# Altium PCB mounting_pcb.PcbDoc (part 1 of 2)
Units mm, origin at the board's own origin, x right, y up, seen from the top; angles counter-clockwise.
Board outline 80 x 80 mm, 2 copper layers (Top Layer, Bottom Layer), stack 0.141 mm thick; 75 components, 159 nets, 340 pads, 197 vias.
Unrouted connection lines stored in the file: 1.
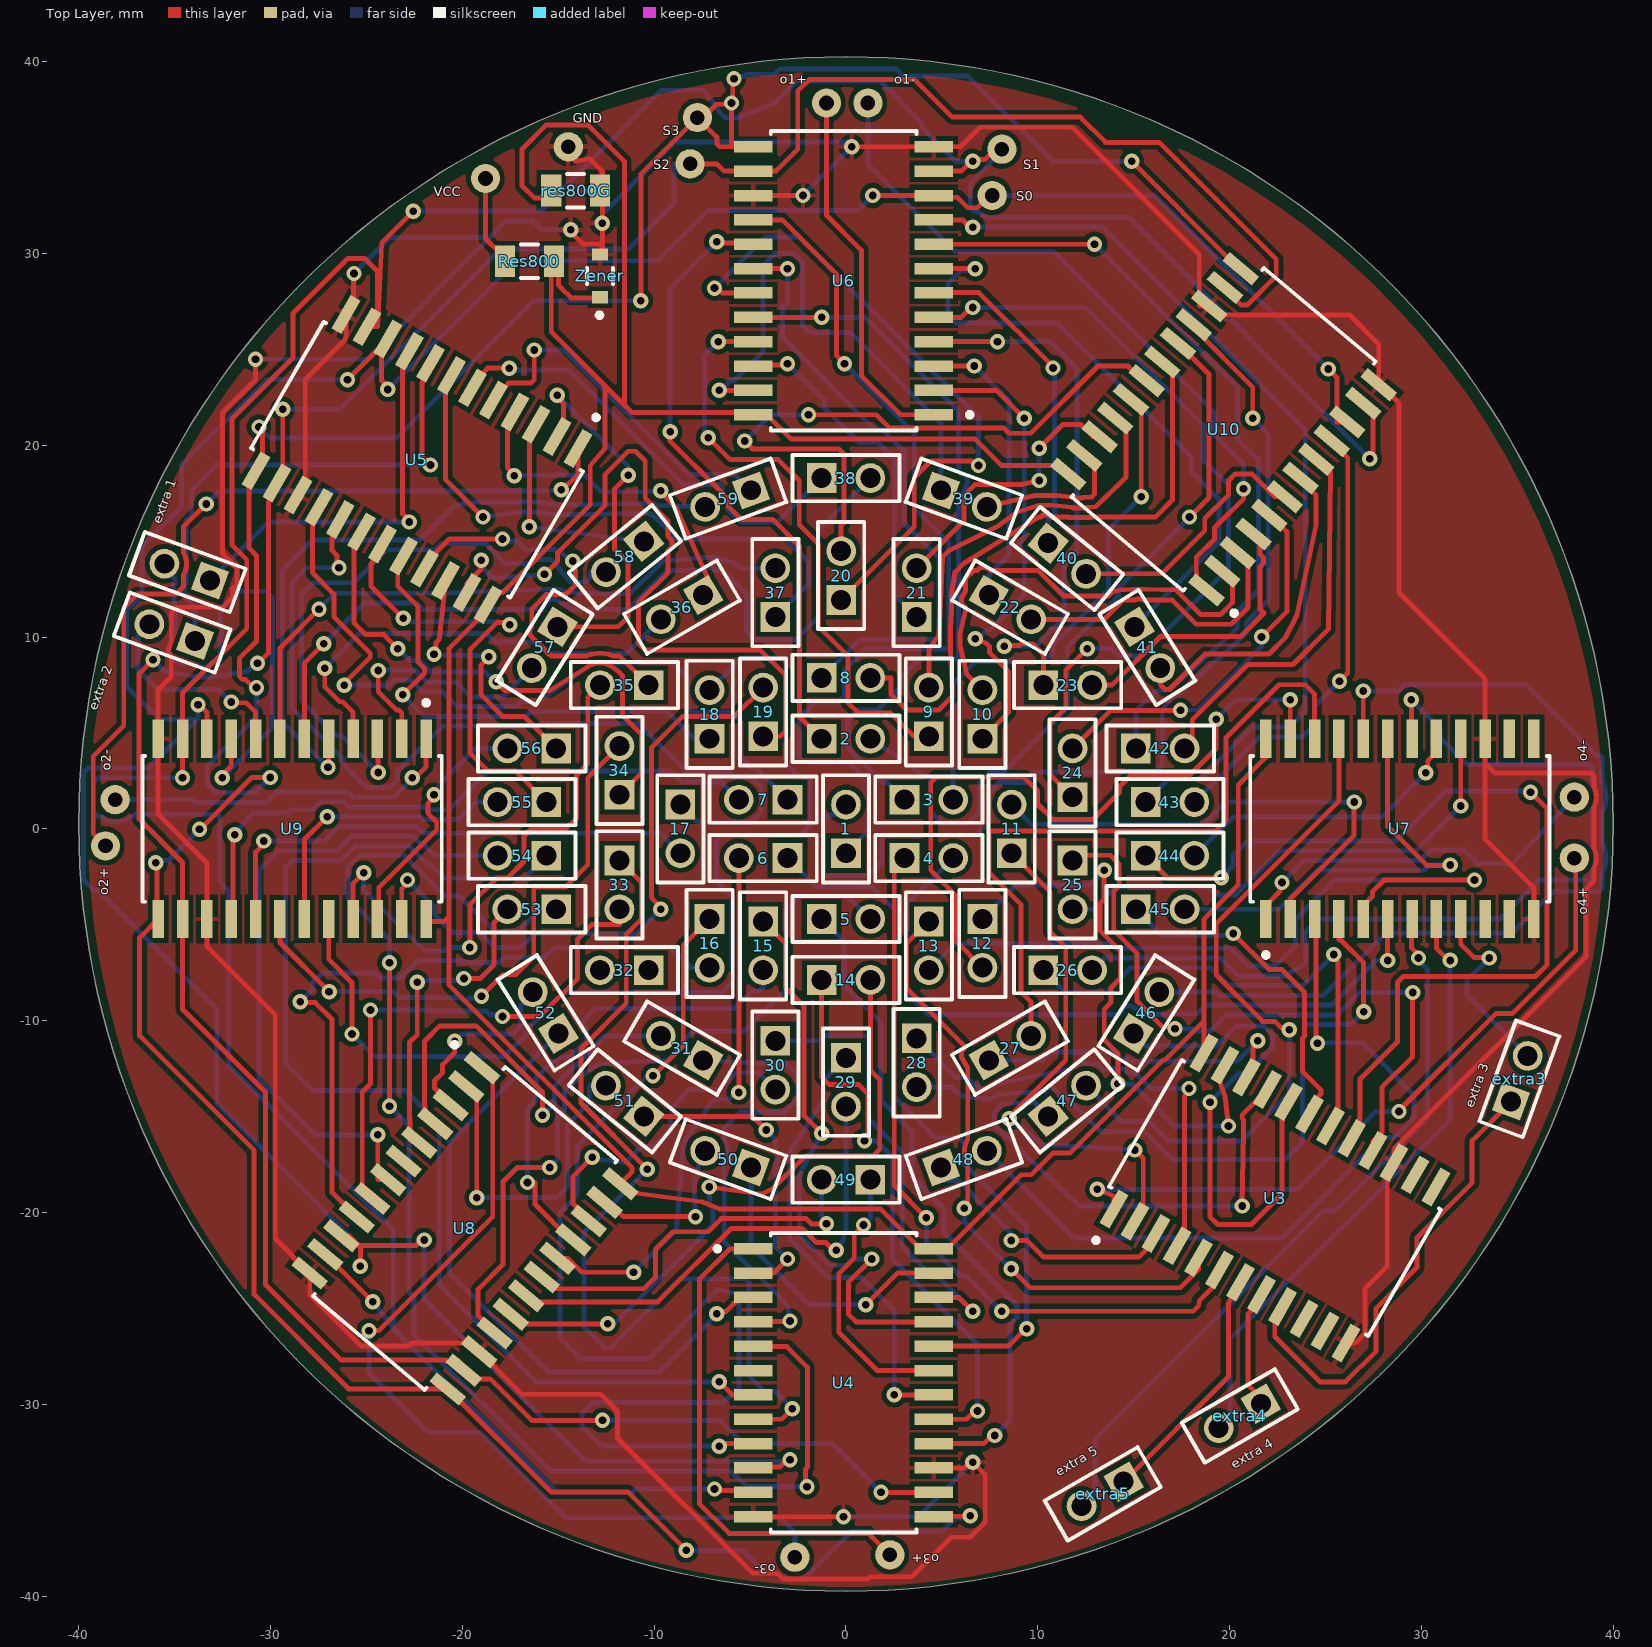
[diagram p0: Top Layer view]
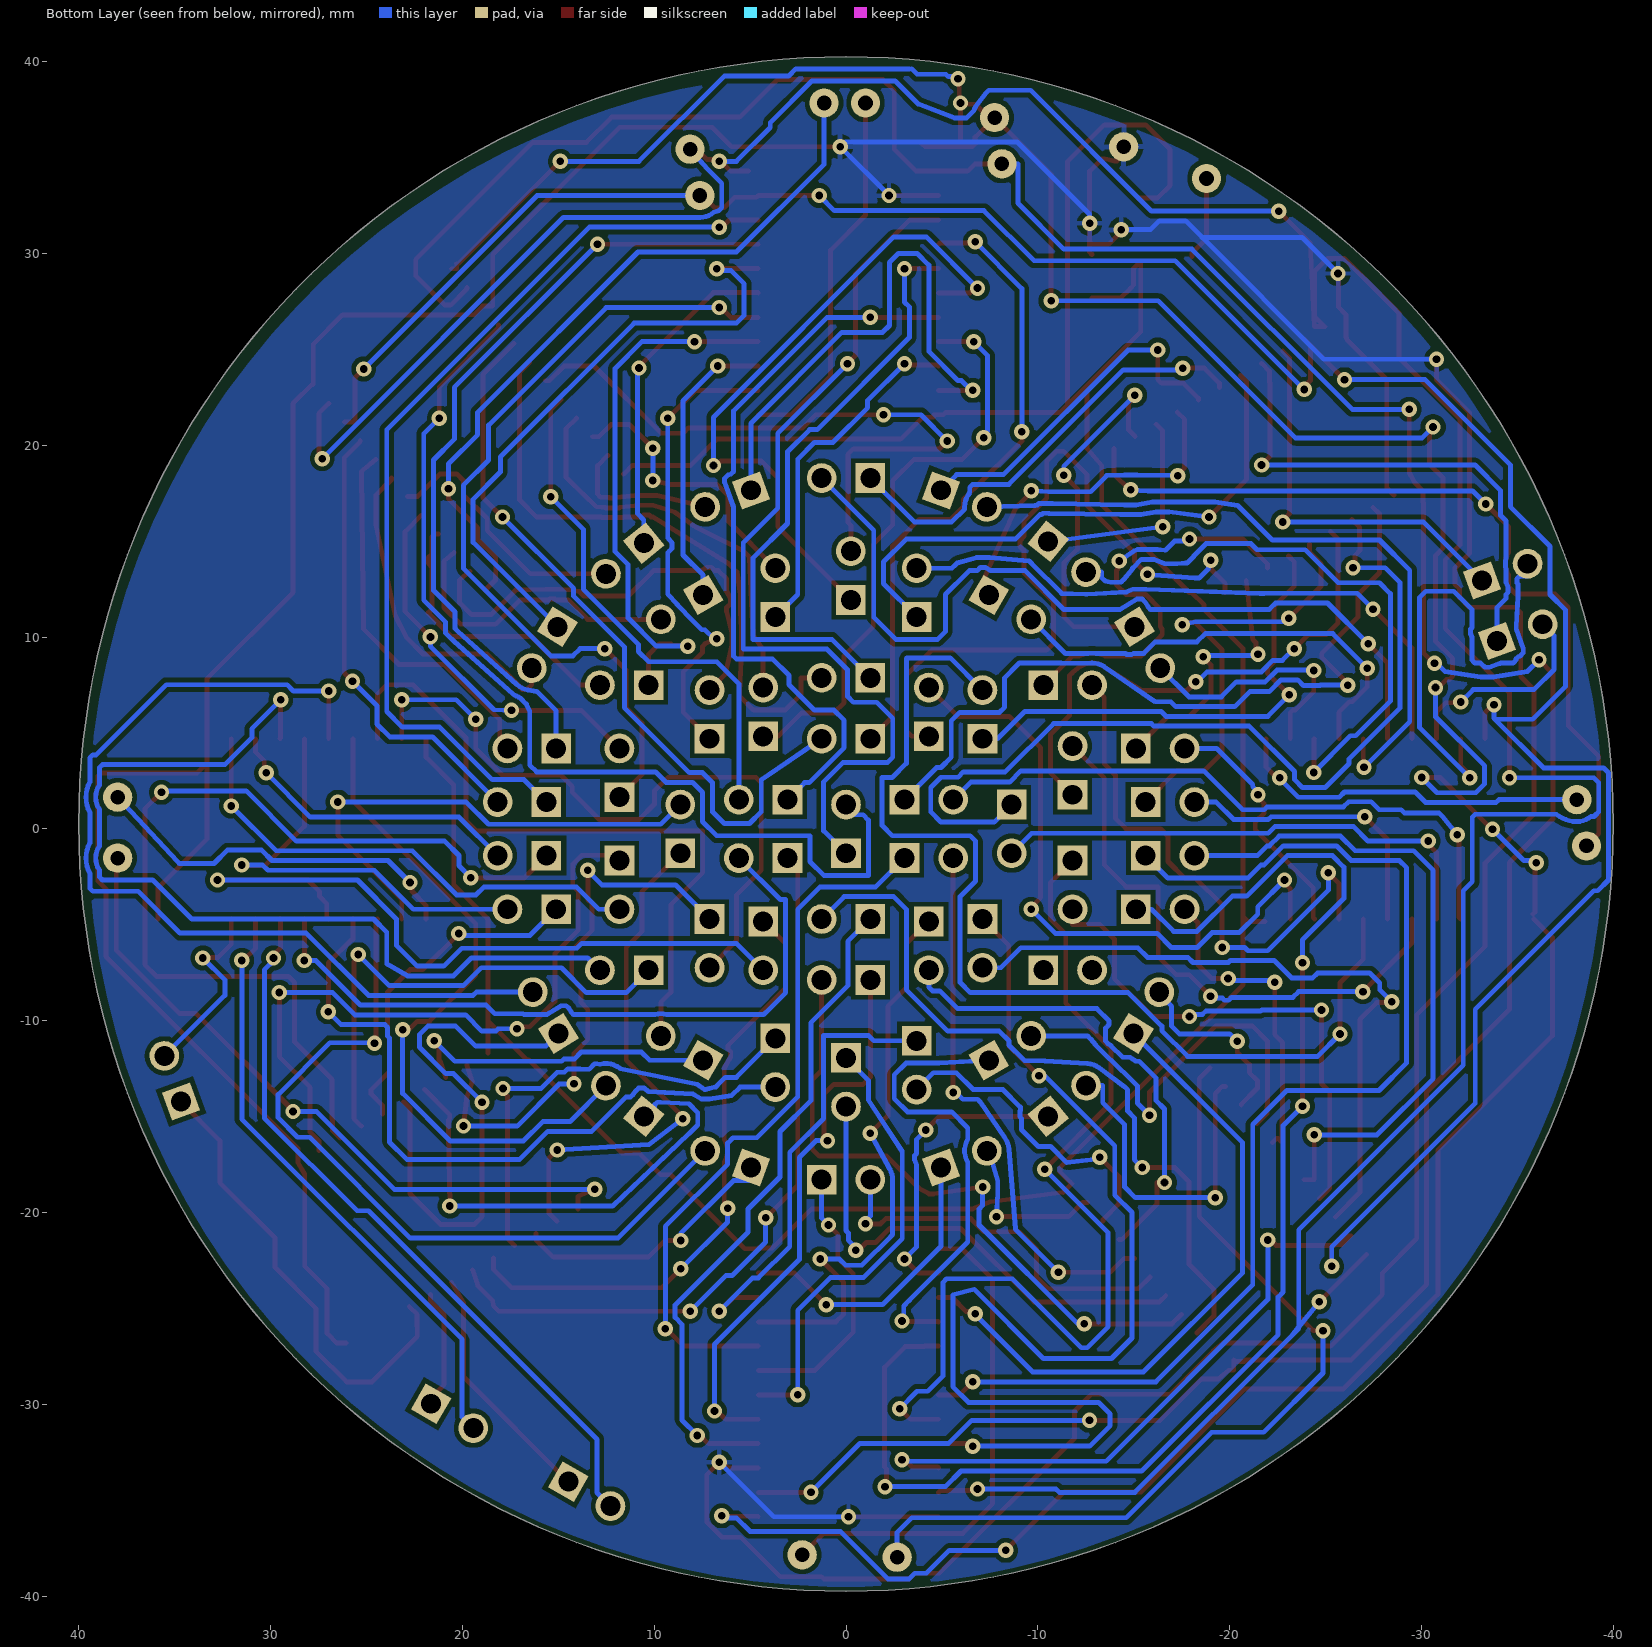
[diagram p1: Bottom Layer view, seen from below]
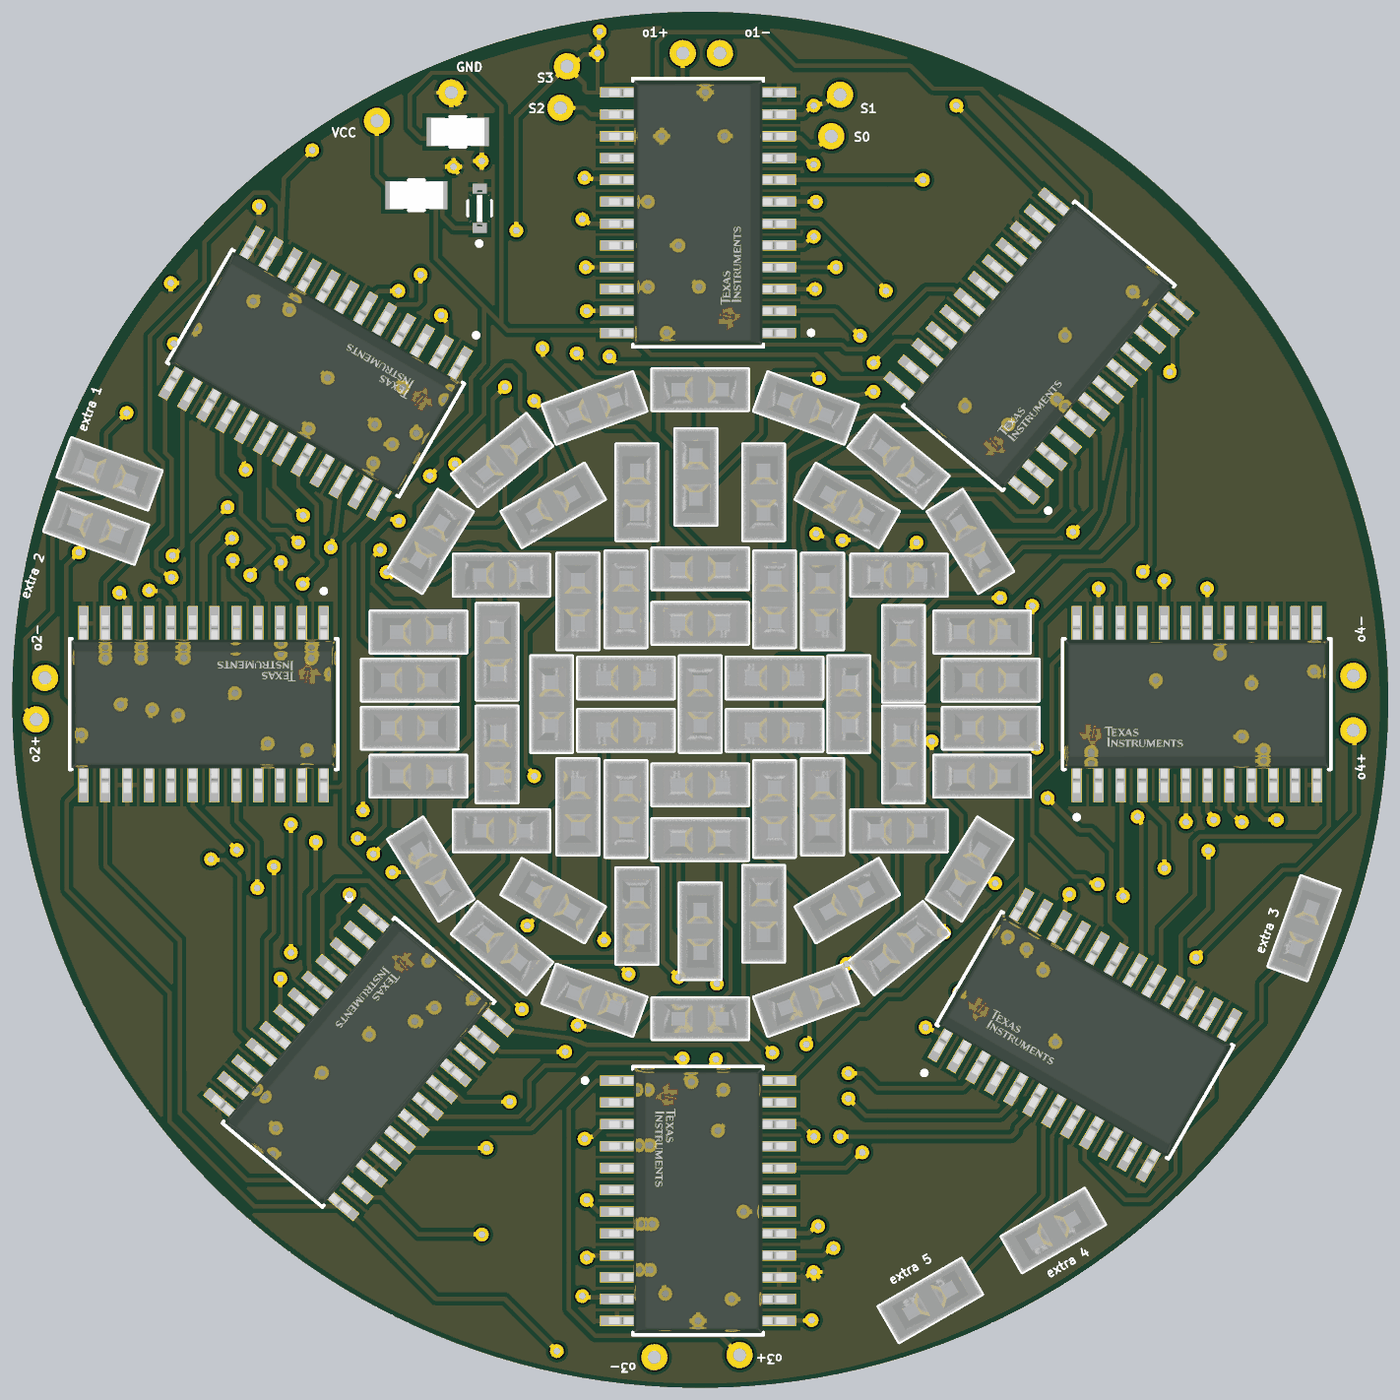
[diagram p3: 3D render of the assembled board from above, using the file's embedded part models]

## Layer stack, top to bottom
Top Solder: solder mask 0.0102, Solder Resist, Dk 3.5
Top Layer: signal copper 0.035
Dielectric 2: prepreg 0.0711, PP-006, Dk 4.1
Bottom Layer: signal copper 0.035
Bottom Solder: solder mask 0.0102, Solder Resist, Dk 3.5

## Board outline
-40,0.254 ccw(c0,0.254) 0,-39.746 ccw(c0,0.254) 40,0.254 ccw(c0,0.254) 0,40.254 ccw(c0,0.254)

## Design rules (kind name [scope] priority, off if disabled: settings)
Clearance [All] p1: gap=0.254 ignorepadtopadclearanceinfootprint=FALSE except(0: Arc-Hole Track-Hole SMDPad-Hole THPad-Hole Via-Hole Fill-Hole Poly-Hole Region-Hole Text-Hole)
PolygonConnect [All] p1: connectstyle=Relief reliefconductorwidth=0.254 reliefentries=4 polygonreliefangle="90 Angle" airgapwidth=0.254
RoutingVias [All] p1: holewidth=0.4 width=0.8 viastyle="Through Hole" minholewidth=0.2 minwidth=0.6 maxholewidth=0.5 maxwidth=1
SMDNeckDown [All] p1: percent=50.000
SolderMaskExpansion [All] p1: expansion=0.102 istentingtop=FALSE
Width [All] p1: maxlimit=0.312 minlimit=0.222 preferedwidth=0.254 minimp=50.000000 maximp=50.000000 favimp=50.000000
30 further rules are at their usual default settings.

## Classes and differential pairs
component class mounting_circuit(2): 1 2 5 7 10 19 23 26 33 41 58 "extra 2" U9 U10
component class mounting_circuit(4): 2 26 28 41 44 45 46 48 50 58 extra3 extra4 U7
component class mounting_circuit(3): 1 2 5 7 8 10 19 23 26 28 41 44 50 U4 U7
component class mounting_circuit: 1 2 7 8 10 23 26 33 41 43 48 58 res800G U10 Zener

## Components (designator, comment, footprint, x,y, rotation, side; value= is the part's Value field where it differs from the comment)
1 "Comment" SMTC-SSW-102-02-X-S 0,-1.27 r90 top
2 "Comment" SMTC-SSW-102-02-X-S -1.27,4.699 r0 top
3 "Comment" SMTC-SSW-102-02-X-S 3.048,1.524 r0 top
4 "Comment" SMTC-SSW-102-02-X-S 3.048,-1.524 r0 top
5 "Comment" SMTC-SSW-102-02-X-S -1.27,-4.699 r0 top
6 "0" SMTC-SSW-102-02-X-S -3.048,-1.524 r180 top
7 "Comment" SMTC-SSW-102-02-X-S -3.048,1.524 r180 top
8 "Comment" SMTC-SSW-102-02-X-S -1.27,7.874 r0 top
9 "1" SMTC-SSW-102-02-X-S 4.318,4.826 r90 top
10 "Comment" SMTC-SSW-102-02-X-S 7.112,4.699 r90 top
11 "1" SMTC-SSW-102-02-X-S 8.636,-1.27 r90 top
12 "Comment" SMTC-SSW-102-02-X-S 7.112,-4.699 r270 top
13 "Comment" SMTC-SSW-102-02-X-S 4.318,-4.826 r270 top
14 "Comment" SMTC-SSW-102-02-X-S -1.27,-7.874 r0 top
15 "Comment" SMTC-SSW-102-02-X-S -4.318,-4.826 r270 top
16 "Comment" SMTC-SSW-102-02-X-S -7.112,-4.699 r270 top
17 "Comment" SMTC-SSW-102-02-X-S -8.636,1.27 r270 top
18 "0" SMTC-SSW-102-02-X-S -7.112,4.699 r90 top
19 "Comment" SMTC-SSW-102-02-X-S -4.318,4.826 r90 top
20 "Comment" SMTC-SSW-102-02-X-S -0.254,11.938 r90 top
21 "Comment" SMTC-SSW-102-02-X-S 3.683,11.049 r90 top
22 "Comment" SMTC-SSW-102-02-X-S 7.452,12.192 r330 top
23 "Comment" SMTC-SSW-102-02-X-S 10.287,7.493 r0 top
24 "0" SMTC-SSW-102-02-X-S 11.811,1.651 r90 top
25 "0" SMTC-SSW-102-02-X-S 11.811,-1.651 r270 top
26 "Comment" SMTC-SSW-102-02-X-S 10.287,-7.366 r0 top
27 "Comment" SMTC-SSW-102-02-X-S 7.452,-12.065 r30 top
28 "Comment" SMTC-SSW-102-02-X-S 3.683,-10.922 r270 top
29 "Comment" SMTC-SSW-102-02-X-S 0,-11.938 r270 top
30 "Comment" SMTC-SSW-102-02-X-S -3.683,-11.049 r270 top
31 "Comment" SMTC-SSW-102-02-X-S -7.452,-12.065 r150 top
32 "Comment" SMTC-SSW-102-02-X-S -10.287,-7.366 r180 top
33 "Comment" SMTC-SSW-102-02-X-S -11.811,-1.651 r270 top
34 "Comment" SMTC-SSW-102-02-X-S -11.811,1.778 r90 top
35 "Comment" SMTC-SSW-102-02-X-S -10.287,7.493 r180 top
36 "Comment" SMTC-SSW-102-02-X-S -7.452,12.192 r210 top
37 "Comment" SMTC-SSW-102-02-X-S -3.683,11.049 r90 top
38 "1" SMTC-SSW-102-02-X-S -1.27,18.288 r0 top
39 "Comment" SMTC-SSW-102-02-X-S 4.953,17.653 r340 top
40 "0" SMTC-SSW-102-02-X-S 10.541,14.896 r321 top
41 "Comment" SMTC-SSW-102-02-X-S 15.037,10.536 r302 top
42 "Comment" SMTC-SSW-102-02-X-S 15.113,4.191 r0 top
43 "Comment" SMTC-SSW-102-02-X-S 15.621,1.397 r0 top
44 "0" SMTC-SSW-102-02-X-S 15.621,-1.397 r0 top
45 "Comment" SMTC-SSW-102-02-X-S 15.113,-4.191 r0 top
46 "Comment" SMTC-SSW-102-02-X-S 14.986,-10.668 r58 top
47 "Comment" SMTC-SSW-102-02-X-S 10.541,-14.986 r39 top
48 "Comment" SMTC-SSW-102-02-X-S 4.953,-17.653 r20 top
49 "0" SMTC-SSW-102-02-X-S 1.27,-18.288 r180 top
50 "Comment" SMTC-SSW-102-02-X-S -4.953,-17.653 r160 top
51 "1" SMTC-SSW-102-02-X-S -10.541,-14.986 r141 top
52 "Comment" SMTC-SSW-102-02-X-S -14.986,-10.668 r122 top
53 "Comment" SMTC-SSW-102-02-X-S -15.113,-4.191 r180 top
54 "Comment" SMTC-SSW-102-02-X-S -15.621,-1.397 r180 top
55 "0" SMTC-SSW-102-02-X-S -15.621,1.397 r180 top
56 "Comment" SMTC-SSW-102-02-X-S -15.113,4.191 r180 top
57 "Comment" SMTC-SSW-102-02-X-S -15.037,10.536 r238 top
58 "Comment" SMTC-SSW-102-02-X-S -10.541,14.986 r219 top
59 "Comment" SMTC-SSW-102-02-X-S -4.953,17.653 r200 top
extra3 "Comment" SMTC-SSW-102-02-X-S 34.671,-14.224 r70 top
extra4 "Comment" SMTC-SSW-102-02-X-S 21.631,-29.972 r210 top
extra5 "Comment" SMTC-SSW-102-02-X-S 14.478,-34.036 r210 top
"extra 1" "Comment" SMTC-SSW-102-02-X-S -33.147,12.954 r160 top
"extra 2" "Comment" SMTC-SSW-102-02-X-S -33.935,9.799 r160 top
Res800 "MCA12060D8000BP500" FP-MCA1206-IPC_C -16.504,29.591 r0 top
res800G "MCA12060D8000BP500" FP-MCA1206-IPC_C -14.097,33.274 r180 top
U3 "CD74HC4067M96" FP-DW0024A-MFG 22.368,-19.247 r60 top
U4 "CD74HC4067M96" FP-DW0024A-MFG -0.127,-28.875 r0 top
U5 "CD74HC4067M96" FP-DW0024A-MFG -22.368,19.247 r240 top
U6 "CD74HC4067M96" FP-DW0024A-MFG -0.127,28.575 r180 top
U7 "CD74HC4067M96" FP-DW0024A-MFG 28.875,0 r90 top
U8 "CD74HC4067M96" FP-DW0024A-MFG -19.865,-20.828 r320 top
U9 "CD74HC4067M96" FP-DW0024A-MFG -28.875,0 r270 top
U10 "CD74HC4067M96" FP-DW0024A-MFG 19.685,20.828 r140 top
Zener "MM3Z5V6ST1G" FP-477-02-MFG -12.827,28.829 r90 top

## Footprints (in the part's own frame and the unit in brackets; to place one, negate y for a bottom-side part, rotate by r counter-clockwise, add the part's x,y. Pads: shape width x height; smd on the part's side, far side on the other; paste and mask are expansions set on the pad)
FP-477-02-MFG [mm]
  rect 0.63x0.83 smd paste+0 mask+0: 1(-1.115,0) 2(1.115,0)
  silkscreen extent -2.17,-0.67 0.42,0.67, body extent -1.53,-0.77 1.53,0.77, height 0.25
FP-DW0024A-MFG [mm]
  rect 2x0.6 smd paste-1000 mask+0: 1(-4.7,6.985) 2(-4.7,5.715) 3(-4.7,4.445) 4(-4.7,3.175) 5(-4.7,1.905) 6(-4.7,0.635) 7(-4.7,-0.635) 8(-4.7,-1.905) 9(-4.7,-3.175) 10(-4.7,-4.445) 11(-4.7,-5.715) 12(-4.7,-6.985) 13(4.7,-6.985) 14(4.7,-5.715) 15(4.7,-4.445) 16(4.7,-3.175) 17(4.7,-1.905) 18(4.7,-0.635) 19(4.7,0.635) 20(4.7,1.905) 21(4.7,3.175) 22(4.7,4.445) 23(4.7,5.715) 24(4.7,6.985)
  silkscreen extent -6.7,-7.8 3.8,7.8, body extent -5.8,-7.98 5.8,7.98, height 0.25
FP-MCA1206-IPC_C [mm]
  rect 1.056x1.658 smd paste+0 mask+0: 1(-1.276,0) 2(1.276,0)
  silkscreen extent -0.45,-0.87 0.45,0.87, body extent -1.9,-0.97 1.9,0.97, height 0.25
SMTC-SSW-102-02-X-S [mm] "SQ Post Socket, 1x2 Pins, Vertical, 2.54mm Pitch, Female"
  rect 1.55x1.55 hole 1.04: 1(0,0)
  round 1.55 hole 1.04: 2(2.54,0)
  silkscreen extent -1.53,-1.2 4.07,1.2, body extent -1.52,-1.21 4.06,1.21, height 8.51

## Part data
1 2 3 4 5 6 7 8 9 10 11 12 13 14 15 16 17 18 19 20 21 22 23 24 25 26 27 28 29 30 31 32 33 34 35 36 37 38 39 40 41 42 43 44 45 46 47 48 49 50 51 52 53 54 55 56 57 58 59 extra3 extra4 extra5 "extra 1" "extra 2": library part CMP-1023-00323-1, "SQ Post Socket, Through-hole, Vertical, -55 to 105 degC, 2.54 mm Pitch, 2-Pin, Female, RoHS", Manufacturer=Samtec, PartNumber=SSW-102-02-T-S, Temperature Range="-55 to 105 degC", ComponentLink1Description="Manufacturer URL", ComponentLink1URL=http://www.samtec.com, ComponentLink2Description=Datasheet, ComponentLink2URL=http://www.samtec.com/documents/webfiles/pdf/SSW_TH.PDF, ComponentLink3Description="Package Specification", ComponentLink3URL=http://www.samtec.com/documents/webfiles/cpdf/SSW-1XX-XX-XXX-X-XX-XXX-XX-MKT.pdf, DatasheetVersion=F-214, Mounting Technology=Through-hole, Orientation=Vertical, PackageDescription="Assembly, Socket Strip .016 X .031 Tail", PackageReference=SSW-102-02-X-S, PackageVersion="CA, 6/1987", Pitch="2.54 mm", RoHS=True
Res800 res800G: library part CMP-02407-008722-1, "Res MC Precision Thin Film 1206 800Ω 0.1% 0.25W ±25ppm/°C Molded Paper T/R", Case/Package=1206, Max Operating Temperature=125°C, Max Power Dissipation=250mW, Min Operating Temperature=-55°C, Package Quantity=5000, Resistance=800R, Temperature Coefficient=25ppm/°C, Tolerance=0.1%, Composition="Thin Film", Height=0.026inch, Lead Free="Lead Free", Length=0.126inch, Number of Terminations=2, Packaging="Tape and Reel", Width=0.063inch
U3 U4 U5 U6 U7 U8 U9 U10: library part CMP-04901-000007-1, "IC MUX/DEMUX 1X16 24SOIC", Ambient Temperature Range High=+125°C, Ambient Temperature Range Low=-55°C, Manufacturer="Texas Instruments", Max Junction Temp=+150°C, Max Supply Voltage=6V, Min Supply Voltage=2V, Package=DW0024A, Quiescent Current=8uA, Temperature="-55°C to +125°C", Automotive=No, Category=IC, ComponentLink2Description=Datasheet, ComponentLink2URL=http://www.ti.com/lit/ds/symlink/cd74hc4067.pdf, Device Class L1="Integrated Circuits (ICs)", Device Class L2="Logic ICs", Device Class L3=Multiplexers, Digikey Description="IC MUX/DEMUX 1X16 24SOIC", Height=2.65mm, Ipc Land Pattern Name=SOIC127P1030X265-24, Lead Free=Yes, Logic Function Desc=Non-Inverting, Manufacturer Part Number=CD74HC4067M96, Mouser Description="Multiplexer Switch ICs Hi-Spd CMOS 16Ch Anl Mltplxr/Demltplxr", Number of Circuits=1, Number Of Inputs=16, Number Of Outputs=1, Octopart=https://octopart.com/cd74hc4067m96-texas+instruments-722802, Propagation Delay=6ns, RoHS=TRUE, Standoff Height=0.1mm, Temperature Range High=+125°C, Temperature Range Low=-55°C
Zener: library part CMP-1060-00706-2, "DIODE ZENER 5.6V 300MW SOD323", Case/Package=SOD-323-2, Forward Voltage=900mV, Max Operating Temperature=150°C, Max Power Dissipation=200mW, Max Reverse Leakage Current=1uA, Min Operating Temperature=-65°C, Package Quantity=1, Test Current=5mA, Tolerance=2%, Voltage Rating (DC)=5.6V, Zener Current=10mA, Contact Plating=Tin, Element Configuration=Single, ESD Protection=Yes, Height=1mm, Impedance=40R, Lead Free="Lead Free", Length=1.8mm, Material=Plastic, Number of Pins=2, Packaging="Tape and Reel", Peak Reverse Current=1uA, Power Dissipation=200mW, Power Rating=200mW, Radiation Hardening=No, REACH SVHC="No SVHC", Voltage Tolerance=2%, Width=1.35mm, Working Voltage=5.6V, Zener Voltage=5.6V

## Free pads (board coordinates)
  round 1.524 hole 0.762: 2(-1.016,37.846) 3(1.143,37.846) 5(-38.608,-0.889) 6(-38.1,1.524) 7(-2.667,-37.973) 7(2.286,-37.846) 9(37.973,-1.524) 10(37.973,1.651) gnd(-14.478,35.56) S0(7.62,33.02) S1(8.128,35.433) S2(-8.128,34.671) S3(-7.747,37.084) vcc(-18.796,33.909)

## Via types
v1: diameter 0.8, hole 0.4, Top Layer to Bottom Layer, 197 vias

## Nets (pads, with @x,y where several pads share a name; then routed paths per layer and width w, separated by ;. In a path a pad name is that pad's centre, name@x,y a point inside that pad or via, vN(x,y) a via of type N, cw(c..) or ccw(c..) an arc to the next point about the centre after c; other vN are vias at no path point)
GND: pad.gnd res800G.1 U3.12 U3.15 U4.12 U4.15 U5.12 U5.15 U6.12 U6.15 U7.12 U7.15 U8.12 U8.15 U9.12 U9.15 U10.12 U10.15 Zener.2 | length 352.6
  Top Layer w0.254: v1(-30.785,24.486) -30.785,23.419 -32.512,21.692 -32.512,14.364 -31.75,13.602 -31.75,12.75 -31.991,12.509 -31.991,12.065 -32.499,11.557 -34.9,11.557 -35.179,11.278 ; U5.15@-28.567,17.399 -28.194,17.773 -28.194,23.428 -26.108,25.514 -26.108,25.561 ; -26.108,25.562 -26.102,25.572 ; v1(-25.654,28.956) -25.686,28.924 -25.686,27.191 U5.12@-26.067,26.81 -26.067,25.632 ; pad.gnd@-14.478,35.56 -14.702,35.235 -14.674,35.241 -14.54,35.241 -14.122,34.823 -13.988,34.823 -13.484,34.94 -13.35,34.94 -12.7,34.29 ; v1(-14.351,31.242) -14.351,31.14 -13.691,30.48 -12.827,30.48 -12.7,30.607 ; Zener.2@-12.827,29.944 -12.7,30.071 -12.7,30.607 ; v1@-12.7,31.496 -12.7,30.607 ; U4.12@-4.827,-35.86 v1(-0.127,-35.86) ; U6.15@-4.827,33.02 v1(-2.244,33.02) ; v1(0.296,35.56) U6.12@4.573,35.56 5.969,35.56 6.985,36.576 11.786,36.576 18.415,29.947 ; U4.15@4.573,-33.32 6.156,-33.32 6.456,-33.02 v1(6.604,-33.02) 7.258,-33.674 7.258,-36.137 6.464,-36.932 5.486,-36.932 3.429,-38.989 1.27,-38.989 1.143,-39.116 -3.277,-39.116 -3.581,-38.811 -4.864,-38.811 -11.912,-31.763 -11.912,-30.353 -12.788,-29.477 -16.899,-29.477 U8.15@-19.122,-27.254 -19.658,-26.804 -22.631,-26.804 -22.794,-26.967 -25.273,-26.967 -27.955,-24.285 U8.12@-27.955,-23.158 -29.756,-21.357 -29.756,-9.69 -33.32,-6.126 U9.15@-33.32,-4.7 -33.32,-1.781 -35.86,0.759 U9.12@-35.86,4.7 -35.86,7.264 -35.179,7.945 -35.179,9.048 -35.31,9.178 -35.31,9.403 -35.179,9.762 ; U3.12@26.067,-26.81 26.543,-26.81 27.051,-26.302 27.051,-23.976 28.217,-22.809 28.217,-18.005 U3.15@28.567,-17.399 28.567,-16.67 38.583,-6.655 38.583,-3.124 38.989,-2.718 ; U7.12@35.86,-4.7 35.86,-3.073 33.32,-0.533 33.32,3.429 ; -35.179,9.762 -35.179,10.495 ; -35.179,9.762 -35.179,10.495 ; -35.179,9.762 -35.179,10.495 ; -35.179,9.762 -35.179,10.495 ; -35.179,9.762 -35.179,10.495 ; -35.179,9.762 -35.179,10.495 ; -35.179,10.495 ccw(c-36.322,10.668) -35.179,10.841 ; -35.179,10.495 ccw(c-36.322,10.668) -35.179,10.841 ; -35.179,10.495 ccw(c-36.322,10.668) -35.179,10.841 ; -35.179,10.495 ccw(c-36.322,10.668) -35.179,10.841 ; -35.179,10.495 ccw(c-36.322,10.668) -35.179,10.841 ; -35.179,10.495 ccw(c-36.322,10.668) -35.179,10.841 ; -35.179,10.495 ccw(c-36.322,10.668) -35.179,10.841 ; -35.179,10.495 ccw(c-36.322,10.668) -35.179,10.841 ; -35.179,10.841 -35.179,11.278 ; -35.179,10.841 -35.179,11.278 ; -35.179,10.841 -35.179,11.278 ; -35.179,10.841 -35.179,11.278 ; -35.179,10.841 -35.179,11.278 ; -35.179,10.841 -35.179,11.278 ; -26.102,25.572 ccw(c-26.321,25.7) -26.101,25.574 ; -26.102,25.572 ccw(c-26.321,25.7) -26.101,25.574 ; -26.102,25.572 ccw(c-26.321,25.7) -26.101,25.574 ; -26.102,25.572 ccw(c-26.321,25.7) -26.101,25.574 ; -26.102,25.572 ccw(c-26.321,25.7) -26.101,25.574 ; -26.102,25.572 ccw(c-26.321,25.7) -26.101,25.574 ; -26.102,25.572 ccw(c-26.321,25.7) -26.101,25.574 ; -26.102,25.572 ccw(c-26.321,25.7) -26.101,25.574 ; -26.101,25.574 -26.067,25.632 ; -26.101,25.574 -26.067,25.632 ; -26.101,25.574 -26.067,25.632 ; -26.101,25.574 -26.067,25.632 ; -12.7,30.607 -12.7,32.893 -12.7,34.29 ; v1(-12.7,31.572) -12.7,34.29 ; v1(-12.7,31.572) res800G.1@-12.7,33.274 ; v1(-12.7,31.572) -12.7,34.29 ; v1(-12.7,31.572) -12.7,34.29 ; v1(-12.7,31.572) res800G.1@-12.7,33.274 ; res800G.1@-12.7,33.274 -12.7,34.29 ; res800G.1@-12.7,33.274 -12.7,34.29 ; 18.415,27.254 U10.15@18.415,27.694 ; 18.415,27.254 18.415,29.947 ; 18.415,27.254 U10.15@18.415,27.694 ; 18.415,27.254 18.415,29.947 ; 18.415,27.254 18.415,29.947 ; 18.415,27.254 U10.15@18.415,27.694 ; 18.415,27.254 U10.15@18.942,27.254 19.392,26.804 20.393,26.804 20.4,26.797 26.251,26.797 27.775,25.273 U10.12@27.775,23.158 27.855,23.158 28.829,22.183 28.829,12.319 33.32,7.828 U7.15@33.32,4.7 33.32,3.429 ; 33.32,3.429 33.828,2.921 38.84,2.921 38.915,2.847 38.989,2.772 ; 38.989,-2.718 38.989,-2.048 ; 38.989,-2.718 38.989,-2.048 ; 38.989,-2.718 38.989,-2.048 ; 38.989,-2.718 38.989,-2.048 ; 38.989,-2.048 ccw(c37.973,-1.524) 38.989,-1 ; 38.989,-2.048 ccw(c37.973,-1.524) 38.989,-1 ; 38.989,-2.048 ccw(c37.973,-1.524) 38.989,-1 ; 38.989,-2.048 ccw(c37.973,-1.524) 38.989,-1 ; 38.989,-2.048 ccw(c37.973,-1.524) 38.989,-1 ; 38.989,-2.048 ccw(c37.973,-1.524) 38.989,-1 ; 38.989,-2.048 ccw(c37.973,-1.524) 38.989,-1 ; 38.989,-2.048 ccw(c37.973,-1.524) 38.989,-1 ; 38.989,-1 38.989,1.127 ; 38.989,-1 38.989,1.127 ; 38.989,-1 38.989,1.127 ; 38.989,-1 38.989,1.127 ; 38.989,1.127 ccw(c37.973,1.651) 38.989,2.175 ; 38.989,1.127 ccw(c37.973,1.651) 38.989,2.175 ; 38.989,1.127 ccw(c37.973,1.651) 38.989,2.175 ; 38.989,1.127 ccw(c37.973,1.651) 38.989,2.175 ; 38.989,1.127 ccw(c37.973,1.651) 38.989,2.175 ; 38.989,1.127 ccw(c37.973,1.651) 38.989,2.175 ; 38.989,1.127 ccw(c37.973,1.651) 38.989,2.175 ; 38.989,1.127 ccw(c37.973,1.651) 38.989,2.175 ; 38.989,2.175 38.989,2.772 ; 38.989,2.175 38.989,2.772 ; 38.989,2.175 38.989,2.772 ; 38.989,2.175 38.989,2.772
  Bottom Layer w0.254: v1(-30.785,24.486) -24.917,24.486 -18.567,30.836 ; v1(-25.654,28.956) -23.774,30.836 -18.567,30.836 ; v1(-14.351,31.242) -15.873,31.242 -16.33,31.699 -17.704,31.699 -18.567,30.836 ; v1(-12.7,31.572) -12.7,32.029 -8.915,35.814 0.042,35.814 v1(0.296,35.56) v1(-2.244,33.02) ; v1(-0.127,-35.86) 3.764,-35.86 v1(6.604,-33.02)
Net1_1: 1.1 U6.16 | length 48
  Top Layer w0.254: U6.16@-4.827,31.75 -3.327,31.75 -0.489,28.912 -0.489,24.67 v1(-0.076,24.257)
  Bottom Layer w0.254: v1(-0.076,24.257) 3.556,20.625 3.556,16.726 5.359,14.922 5.359,9.373 0.991,9.373 -0.076,8.306 -0.076,6.909 -0.381,6.604 -1.6,6.604 -2.438,5.766 -2.438,3.734 -2.159,3.454 0.161,3.454 1.168,2.447 1.168,-0.102 1.1@0,-1.27
Net1_2: 1.2 U10.16 | length 56.1
  Top Layer w0.254: U10.16@18.125,26.281 18.125,26.111 21.209,23.028 v1(21.209,21.412)
  Bottom Layer w0.254: 1.2@0,1.27 1.2@0,0.737 ; v1(21.209,21.412) 22.015,20.606 22.015,11.925 20.888,10.797 20.888,10.22 20.739,10.071 20.441,9.791 17.353,7.016 17.182,6.922 cw(c16.383,8.382) 16.994,6.834 16.662,6.502 16.485,6.13 16.485,3.327 16.129,2.972 9.931,2.972 9.386,2.426 8.001,2.426 7.48,1.905 7.48,0.381 6.743,-0.356 1.88,-0.356 1.88,-1.702 1.143,-2.438 -1.168,-2.438 -1.168,0.457 -0.889,0.737 ; -0.889,0.737 1.2@0,0.737 ; -0.889,0.737 1.2@0,0.737 ; -0.889,0.737 1.2@0,0.737 ; -0.889,0.737 1.2@0,0.737
Net1k_2: 
Net2_1: 2.1 U6.17 | length 47.8
  Top Layer w0.254: v1(-9.169,20.701) -9.169,20.218 ; v1(-6.731,30.607) -6.667,30.543 -4.891,30.543 U6.17@-4.827,30.48 ; 2.1@-1.27,4.699 -2.426,5.855 -2.426,14.745 -3.817,16.136 -5.461,16.136 -6.121,16.797 -6.121,17.17 ; -9.169,20.218 -6.694,17.743 ; -9.169,20.218 -6.694,17.743 ; -9.169,20.218 -6.694,17.743 ; -9.169,20.218 -6.694,17.743 ; -6.694,17.743 cw(c-7.34,16.784) -6.381,17.43 ; -6.694,17.743 cw(c-7.34,16.784) -6.381,17.43 ; -6.694,17.743 cw(c-7.34,16.784) -6.381,17.43 ; -6.694,17.743 cw(c-7.34,16.784) -6.381,17.43 ; -6.694,17.743 cw(c-7.34,16.784) -6.381,17.43 ; -6.694,17.743 cw(c-7.34,16.784) -6.381,17.43 ; -6.694,17.743 cw(c-7.34,16.784) -6.381,17.43 ; -6.694,17.743 cw(c-7.34,16.784) -6.381,17.43 ; -6.381,17.43 -6.121,17.17 ; -6.381,17.43 -6.121,17.17 ; -6.381,17.43 -6.121,17.17 ; -6.381,17.43 -6.121,17.17
  Bottom Layer w0.254: v1(-9.169,20.701) -9.169,28.169 v1(-6.731,30.607)
Net2_2: 2.2 U10.17 | length 39
  Top Layer w0.254: U10.17@17.309,25.308 18.923,23.694 18.923,17.272 v1(17.907,16.256)
  Bottom Layer w0.254: 2.2@1.27,4.699 4.42,2.54 4.42,0.889 5.029,0.279 6.35,0.279 6.96,0.889 6.96,2.413 7.481,2.934 8.166,2.934 11.557,6.325 11.557,9.486 14.199,12.128 14.199,12.548 v1(17.907,16.256)
Net2k_1: 
Net2k_2: 
Net3_1: 3.1 U6.20 | length 38.7
  Top Layer w0.254: U6.20@-4.827,26.67 v1(-1.27,26.67)
  Bottom Layer w0.254: v1(-1.27,26.67) 0.983,26.67 5.793,21.86 5.867,21.786 5.867,18.623 5.982,18.509 6.156,18.445 6.327,18.274 6.327,18.049 5.867,16.785 5.867,9.013 5.793,8.939 5.719,8.865 3.835,8.865 2.972,8.001 2.972,7.518 1.651,6.198 0.635,6.198 0.102,5.664 0.102,4.233 1.921,2.413 2.159,2.413 3.1@3.048,1.524
Net3_2: 3.2 U10.20 | length 27.2
  Top Layer w0.254: U10.20@14.86,22.39 15.392,21.857 v1(15.392,17.323)
  Bottom Layer w0.254: 3.2@5.588,1.524 5.588,7.569 6.731,8.712 10.287,8.712 10.82,9.246 10.82,9.627 13.691,12.497 13.691,15.621 v1(15.392,17.323)
Net4_1: 4.1 U3.6 | length 39
  Top Layer w0.254: 4.1@3.048,-1.524 2.515,-2.057 2.515,-18.593 v1(4.191,-20.269) ; v1(8.128,-25.146) 18.103,-25.146 18.39,-24.859 18.414,-24.61 19.181,-23.842 19.2,-23.786 U3.6@19.468,-23
  Bottom Layer w0.254: v1(4.191,-20.269) 4.191,-21.539 5.942,-23.29 6.272,-23.29 v1(8.128,-25.146)
Net4_2: 4.2 U7.6 | length 88.2
  Top Layer w0.254: v1(28.24,-6.863) U7.6@28.24,-4.7
  Bottom Layer w0.254: 4.2@5.588,-1.524 3.429,-3.683 3.15,-3.683 3.15,-8.534 4.218,-9.603 4.293,-9.677 ; v1(28.24,-6.863) 27.636,-6.863 25.311,-9.188 18.764,-9.188 18.314,-9.638 16.827,-9.638 16.795,-9.67 15.643,-9.67 15.575,-9.67 15.509,-9.631 14.849,-9.219 14.582,-9.219 14.439,-9.361 14.301,-9.583 14.206,-9.677 ; 4.293,-9.677 9.356,-9.677 ; 4.293,-9.677 9.356,-9.677 ; 4.293,-9.677 9.356,-9.677 ; 4.293,-9.677 9.356,-9.677 ; 4.293,-9.677 9.356,-9.677 ; 4.293,-9.677 9.356,-9.677 ; 9.356,-9.677 cw(c9.652,-10.795) 9.947,-9.677 ; 9.356,-9.677 cw(c9.652,-10.795) 9.947,-9.677 ; 9.356,-9.677 cw(c9.652,-10.795) 9.947,-9.677 ; 9.356,-9.677 cw(c9.652,-10.795) 9.947,-9.677 ; 9.356,-9.677 cw(c9.652,-10.795) 9.947,-9.677 ; 9.356,-9.677 cw(c9.652,-10.795) 9.947,-9.677 ; 9.356,-9.677 cw(c9.652,-10.795) 9.947,-9.677 ; 9.356,-9.677 cw(c9.652,-10.795) 9.947,-9.677 ; 9.947,-9.677 14.206,-9.677 ; 9.947,-9.677 14.206,-9.677 ; 9.947,-9.677 14.206,-9.677 ; 9.947,-9.677 14.206,-9.677 ; 9.947,-9.677 14.206,-9.677 ; 9.947,-9.677 14.206,-9.677
Net5.1k_1: 
Net5_1: 5.1 U4.16 | length 35
  Top Layer w0.254: U4.16@4.573,-32.05 7.172,-32.05 7.599,-31.623 v1(7.747,-31.623)
  Bottom Layer w0.254: 5.1@-1.27,-4.699 -0.102,-5.867 -0.102,-8.179 1.834,-10.114 1.834,-14.168 3.442,-15.776 3.442,-18.149 5.11,-19.816 5.11,-21.023 8.909,-24.823 8.909,-25.469 8.553,-25.825 8.553,-30.817 v1(7.747,-31.623)
Net5_2: 5.2 U8.16 | length 48.6
  Top Layer w0.254: U8.16@-18.305,-26.281 -18.305,-26.259 -19.177,-25.387 -19.177,-24.003 -17.882,-22.708 -17.882,-18.39 -17.145,-17.653 v1(-15.443,-17.653)
  Bottom Layer w0.254: v1(-15.443,-17.653) -15.037,-17.247 -15.037,-15.062 -14.681,-14.707 -14.681,-13.709 -14.681,-13.604 -14.532,-13.455 ; 5.2@1.27,-4.699 0.102,-3.531 -2.489,-3.531 -3.15,-4.191 -3.15,-8.382 -5.309,-10.541 -7.988,-10.541 -8.496,-11.049 -8.496,-11.274 -9.238,-12.016 -9.313,-12.09 -10.382,-12.097 -12.585,-12.234 ; -14.532,-13.455 -13.208,-12.462 ; -14.532,-13.455 -13.208,-12.462 ; -14.532,-13.455 -13.208,-12.462 ; -14.532,-13.455 -13.208,-12.462 ; -13.208,-12.462 cw(c-12.515,-13.388) -12.585,-12.234 ; -13.208,-12.462 cw(c-12.515,-13.388) -12.585,-12.234 ; -13.208,-12.462 cw(c-12.515,-13.388) -12.585,-12.234 ; -13.208,-12.462 cw(c-12.515,-13.388) -12.585,-12.234 ; -13.208,-12.462 cw(c-12.515,-13.388) -12.585,-12.234 ; -13.208,-12.462 cw(c-12.515,-13.388) -12.585,-12.234 ; -13.208,-12.462 cw(c-12.515,-13.388) -12.585,-12.234 ; -13.208,-12.462 cw(c-12.515,-13.388) -12.585,-12.234
Net6_1: 6.1 U4.20 | length 37.4
  Top Layer w0.254: U4.20@4.573,-26.97 8.457,-26.97 9.363,-26.063 v1(9.42,-26.063)
  Bottom Layer w0.254: 6.1@-3.048,-1.524 -1.549,-3.023 1.346,-3.023 2.515,-4.191 2.515,-13.97 4.648,-16.104 5.893,-16.104 6.172,-16.383 6.172,-17.475 9.42,-20.723 v1(9.42,-26.063)
Net6_2: 6.2 U8.20 | length 52.1
  Top Layer w0.254: U8.20@-15.04,-22.39 -14.503,-22.39 -13.779,-23.114 v1(-11.074,-23.114) ; v1(-5.588,-13.741) 6.2@-5.588,-1.524
  Bottom Layer w0.254: v1(-11.074,-23.114) -8.828,-20.867 ; v1(-5.588,-13.741) -5.736,-13.741 -6.091,-14.097 -6.859,-14.097 -6.951,-14.189 -6.98,-14.224 ; -8.828,-20.867 -8.492,-16.692 ; -8.828,-20.867 -8.492,-16.692 ; -8.828,-20.867 -8.492,-16.692 ; -8.828,-20.867 -8.492,-16.692 ; -8.492,-16.692 cw(c-7.34,-16.784) -8.291,-16.128 ; -8.492,-16.692 cw(c-7.34,-16.784) -8.291,-16.128 ; -8.492,-16.692 cw(c-7.34,-16.784) -8.291,-16.128 ; -8.492,-16.692 cw(c-7.34,-16.784) -8.291,-16.128 ; -8.492,-16.692 cw(c-7.34,-16.784) -8.291,-16.128 ; -8.492,-16.692 cw(c-7.34,-16.784) -8.291,-16.128 ; -8.492,-16.692 cw(c-7.34,-16.784) -8.291,-16.128 ; -8.492,-16.692 cw(c-7.34,-16.784) -8.291,-16.128 ; -8.291,-16.128 -6.98,-14.224 ; -8.291,-16.128 -6.98,-14.224 ; -8.291,-16.128 -6.98,-14.224 ; -8.291,-16.128 -6.98,-14.224
Net7_1: 7.1 U5.16 | length 54
  Top Layer w0.254: U5.16@-27.468,16.764 -27.813,16.419 -27.813,13.352 -26.697,12.236 -26.697,11.051 -24.8,9.154 -24.8,8.943 -26.162,7.581 v1(-26.162,7.493)
  Bottom Layer w0.254: v1(-26.162,7.493) -24.726,7.493 -24.707,7.474 -23.839,7.474 -23.547,7.766 -22.679,7.766 -22.069,7.156 -21.05,7.156 -20.269,6.375 -17.192,6.375 -16.938,6.629 -16.12,6.629 -13.482,8.445 ; 7.1@-3.048,1.524 -4.724,3.2 -4.953,3.2 -5.486,3.734 -5.486,5.626 -5.931,6.071 -8.001,6.071 -8.268,6.338 -8.268,7.875 -8.968,8.575 -9.042,8.649 -11.206,8.649 -11.219,8.636 ; -13.482,8.445 cw(c-12.827,7.493) -12.654,8.636 ; -13.482,8.445 cw(c-12.827,7.493) -12.654,8.636 ; -13.482,8.445 cw(c-12.827,7.493) -12.654,8.636 ; -13.482,8.445 cw(c-12.827,7.493) -12.654,8.636 ; -13.482,8.445 cw(c-12.827,7.493) -12.654,8.636 ; -13.482,8.445 cw(c-12.827,7.493) -12.654,8.636 ; -13.482,8.445 cw(c-12.827,7.493) -12.654,8.636 ; -13.482,8.445 cw(c-12.827,7.493) -12.654,8.636 ; -12.654,8.636 -11.219,8.636 ; -12.654,8.636 -11.219,8.636 ; -12.654,8.636 -11.219,8.636 ; -12.654,8.636 -11.219,8.636 ; -12.654,8.636 -11.219,8.636 ; -12.654,8.636 -11.219,8.636
Net7_2: 7.2 U9.16 | length 33.2
  Top Layer w0.254: U9.16@-32.05,-4.7 -31.96,-4.61 -31.96,-0.395 v1(-31.87,-0.305)
  Bottom Layer w0.254: v1(-31.87,-0.305) -31.113,0.632 -30.926,0.819 -29.125,0.819 -28.947,0.997 -27.793,0.997 -27.374,1.416 -26.201,1.416 -25.928,1.143 -21.951,1.143 -21.805,0.997 -20.676,0.997 -18.65,3.023 -9.119,3.023 -8.534,2.438 -6.502,2.438 7.2@-5.588,1.524
Net8_1: 8.1 U6.18 | length 31.8
  Top Layer w0.254: U6.18@-4.827,29.21 v1(-3.048,29.21)
  Bottom Layer w0.254: v1(-3.048,29.21) -3.048,27.466 -3.302,27.212 -3.302,25.615 1.497,20.817 1.897,20.817 3.048,19.666 3.048,15.921 4.851,14.118 4.851,9.881 0.737,9.881 8.1@-1.27,7.874
Net8_2: 8.2 U10.18 | length 32.3
  Top Layer w0.254: 8.2@1.27,7.874 2.337,7.874 2.337,7.023 3.162,6.198 4.826,6.198 5.539,6.911 5.539,7.12 5.442,9.372 5.442,10.44 5.505,11.331 5.505,12.221 5.688,13.384 6.149,13.845 10.058,16.256 10.158,16.256 10.269,16.367 10.561,16.367 10.698,16.256 11.581,16.256 11.608,16.229 12.747,16.229 12.774,16.256 16.129,16.256 17.018,17.145 17.018,23.81 U10.18@16.493,24.336
Net9_1: 9.1 U6.21 | length 30.5
  Top Layer w0.254: v1(-7.188,20.396) -6.045,19.253 -3.531,19.253 -2.438,18.161 -2.438,15.85 -1.422,14.834 -1.422,10.541 0.102,9.017 0.102,6.579 0.635,6.045 2.311,6.045 3.53,4.826 9.1@4.318,4.826 ; v1(-6.655,25.4) U6.21@-4.827,25.4
  Bottom Layer w0.254: v1(-7.188,20.396) -7.188,20.544 -7.385,20.741 -7.385,24.67 v1(-6.655,25.4)
Net9_2: 9.2 U10.21 | length 25.9
  Top Layer w0.254: 9.2@4.318,7.366 4.318,9.344 4.839,10.116 5.027,14.171 5.276,14.42 5.35,14.494 7.857,15.751 ; U10.21@14.044,21.417 14.605,20.856 14.605,18.339 14.456,18.19 13.009,16.791 12.564,16.764 12.536,16.737 11.819,16.737 11.792,16.764 10.772,16.875 10.058,16.875 8.9,16.505 ; 7.857,15.751 ccw(c7.34,16.784) 8.031,15.858 ; 7.857,15.751 ccw(c7.34,16.784) 8.031,15.858 ; 7.857,15.751 ccw(c7.34,16.784) 8.031,15.858 ; 7.857,15.751 ccw(c7.34,16.784) 8.031,15.858 ; 7.857,15.751 ccw(c7.34,16.784) 8.031,15.858 ; 7.857,15.751 ccw(c7.34,16.784) 8.031,15.858 ; 7.857,15.751 ccw(c7.34,16.784) 8.031,15.858 ; 7.857,15.751 ccw(c7.34,16.784) 8.031,15.858 ; 8.031,15.858 8.9,16.505 ; 8.031,15.858 8.9,16.505 ; 8.031,15.858 8.9,16.505 ; 8.031,15.858 8.9,16.505
Net10_1: 10.1 U6.2 | length 27.9
  Top Layer w0.254: U6.2@4.573,22.86 7.849,22.86 v1(9.296,21.412) ; v1(6.731,9.906) 7.325,9.672 7.474,9.523 7.474,9.202 8.484,8.192 8.484,6.071 10.1@7.112,4.699
  Bottom Layer w0.254: v1(6.731,9.906) 6.879,9.906 7.354,10.381 7.523,10.381 7.894,10.752 8.041,10.899 8.725,11.613 ; v1(9.296,21.412) 9.296,15.196 9.07,14.916 9.07,14.624 9.196,14.498 9.213,14.484 9.296,14.4 9.296,12.243 ; 8.725,11.613 cw(c9.652,10.922) 8.801,11.705 ; 8.725,11.613 cw(c9.652,10.922) 8.801,11.705 ; 8.725,11.613 cw(c9.652,10.922) 8.801,11.705 ; 8.725,11.613 cw(c9.652,10.922) 8.801,11.705 ; 8.725,11.613 cw(c9.652,10.922) 8.801,11.705 ; 8.725,11.613 cw(c9.652,10.922) 8.801,11.705 ; 8.725,11.613 cw(c9.652,10.922) 8.801,11.705 ; 8.725,11.613 cw(c9.652,10.922) 8.801,11.705 ; 8.801,11.705 9.296,12.243 ; 8.801,11.705 9.296,12.243 ; 8.801,11.705 9.296,12.243 ; 8.801,11.705 9.296,12.243
Net10_2: 10.2 U10.2 | length 23.9
  Top Layer w0.254: 10.2@7.112,7.239 6.297,8.054 5.95,9.583 5.95,10.229 6.223,11.33 6.223,11.54 6.149,11.615 6.013,11.75 6.013,12.01 6.223,12.375 6.223,13.03 6.655,13.462 6.841,13.462 7.011,13.632 7.271,13.632 7.565,13.462 10.033,13.462 10.108,13.388 11.354,12.142 13.665,12.142 13.895,12.372 14.273,12.446 14.964,12.493 15.652,12.493 17.231,12.446 17.306,12.372 18.501,11.176 19.536,11.176 20.142,11.782 20.142,12.973 20.148,12.979 U10.2@19.612,13.429
Net11_1: 11.1 U3.2 | length 27.3
  Top Layer w0.254: v1(8.509,-15.113) 8.509,-15.011 11.455,-12.065 11.455,-6.172 10.643,-5.359 10.643,-3.277 11.1@8.636,-1.27 ; v1(15.062,-16.739) 15.494,-17.17 15.494,-19.438 15.476,-19.456 15.476,-20.053 U3.2@15.069,-20.46
  Bottom Layer w0.254: v1(8.509,-15.113) 10.269,-16.457 v1(15.062,-16.739)
Net11_2: 11.2 U7.2 | length 26.2
  Top Layer w0.254: U7.2@23.16,-4.7 23.16,-3.658 26.492,-0.325 v1(26.492,1.397)
  Bottom Layer w0.254: 11.2@8.636,1.27 9.665,0.241 18.64,0.241 19.796,1.397 v1(26.492,1.397)
Net12_1: 12.1 U3.23 | length 29.7
  Top Layer w0.254: v1(13.462,-2.159) 13.449,-2.172 13.449,-3.694 13.233,-3.909 13.233,-5.283 14.3,-6.35 14.3,-7.798 13.818,-8.28 13.818,-9.049 13.462,-9.404 13.462,-10.997 14.18,-11.715 v1(14.18,-13.291) ; U3.23@19.769,-12.319 19.482,-13.162 19.755,-13.926 v1(19.939,-15.494)
  Bottom Layer w0.254: 12.1@7.112,-4.699 8.89,-2.921 12.725,-2.921 13.462,-2.184 v1(13.462,-2.159) ; v1(14.18,-13.291) 14.199,-13.31 14.961,-13.31 17.145,-15.494 v1(19.939,-15.494)
Net12_2: 12.2 U7.23 | length 36.6
  Top Layer w0.254: 12.2@7.112,-7.239 5.715,-5.842 5.715,-3.454 4.42,-2.159 4.42,2.413 4.699,2.692 9.271,2.692 9.982,1.981 9.982,1.295 10.795,0.483 12.852,0.483 14.275,1.905 14.275,2.21 14.859,2.794 17.907,2.794 19.304,4.191 v1(19.304,5.715) ; U7.23@23.16,4.7 v1(23.16,6.731)
  Bottom Layer w0.254: v1(19.304,5.715) 20.32,6.731 v1(23.16,6.731)
Net13_1: 13.1 U3.5 | length 70.8
  Top Layer w0.254: 13.1@4.318,-4.826 3.15,-5.994 3.15,-8.28 6.147,-11.278 6.147,-11.489 6.012,-11.623 6.012,-11.883 6.35,-12.468 ; v1(6.172,-19.787) v1@6.35,-19.609 ; v1(8.611,-22.936) 9.601,-23.927 17.428,-23.927 18.368,-22.987 U3.5@18.368,-22.365 ; v1@6.35,-19.609 6.35,-17.381 ; v1@6.35,-19.609 6.35,-17.381 ; v1@6.35,-19.609 6.35,-17.381 ; v1@6.35,-19.609 6.35,-17.381 ; v1@6.35,-19.609 6.35,-17.381 ; v1@6.35,-19.609 6.35,-17.381 ; 6.35,-17.381 cw(c7.34,-16.784) 6.35,-16.187 ; 6.35,-17.381 cw(c7.34,-16.784) 6.35,-16.187 ; 6.35,-17.381 cw(c7.34,-16.784) 6.35,-16.187 ; 6.35,-17.381 cw(c7.34,-16.784) 6.35,-16.187 ; 6.35,-17.381 cw(c7.34,-16.784) 6.35,-16.187 ; 6.35,-17.381 cw(c7.34,-16.784) 6.35,-16.187 ; 6.35,-17.381 cw(c7.34,-16.784) 6.35,-16.187 ; 6.35,-17.381 cw(c7.34,-16.784) 6.35,-16.187 ; 6.35,-16.187 6.35,-12.468 ; 6.35,-16.187 6.35,-12.468 ; 6.35,-16.187 6.35,-12.468 ; 6.35,-16.187 6.35,-12.468 ; 6.35,-16.187 6.35,-12.468 ; 6.35,-16.187 6.35,-12.468
  Bottom Layer w0.254: v1(6.172,-19.787) 6.172,-20.498 v1(8.611,-22.936)
Net13_2: 13.2 U7.5 | length 39.4
  Top Layer w0.254: U7.5@26.97,-4.7 27.074,-4.596 27.074,-3.896 27.446,-3.524 27.446,-3.279 28.058,-2.667 v1(32.766,-2.667)
  Bottom Layer w0.254: 13.2@4.318,-7.366 5.715,-5.969 13.78,-5.969 14.034,-6.223 20.035,-6.223 20.969,-7.156 22.353,-7.156 23.438,-6.072 23.438,-4.699 25.47,-2.667 v1(32.766,-2.667)
Net14_1: 14.1 U4.17 | length 29.7
  Top Layer w0.254: 14.1@-1.27,-7.874 -1.27,-12.941 -0.889,-13.322 0.635,-13.322 1.156,-13.843 1.156,-16.065 v1(0.965,-16.256) ; U4.17@4.573,-30.78 6.283,-30.78 6.71,-30.353 v1(6.858,-30.353)
  Bottom Layer w0.254: v1(0.965,-16.256) 1.562,-16.256 2.426,-17.12 2.426,-22.441 6.858,-26.873 v1(6.858,-30.353)
Net14_2: 14.2 U8.17 | length 33.8
  Top Layer w0.254: U8.17@-17.489,-25.308 -16.991,-25.806 v1(-12.421,-25.806) ; v1(-7.131,-18.669) -7.112,-18.669 -4.557,-19.027 -4.332,-19.027 -3.812,-18.747 -2.123,-17.058 1.397,-17.058 1.759,-16.696 1.759,-13.081 1.27,-12.592 14.2@1.27,-7.874
  Bottom Layer w0.254: v1(-12.421,-25.806) -12.09,-25.806 -6.934,-20.65 -6.934,-19.822 -7.112,-19.645 -7.112,-19.367 v1(-7.131,-18.669)
Net15_1: 15.1 U4.21 | length 49.4
  Top Layer w0.254: 15.1@-4.318,-4.826 -3.15,-5.994 -3.15,-8.28 -2.184,-9.246 -2.184,-14.961 v1(-1.27,-15.875) ; v1(1.346,-22.425) 0.127,-23.644 0.127,-25.298 0.529,-25.7 U4.21@4.573,-25.7
  Bottom Layer w0.254: v1(1.346,-22.425) 0.347,-22.425 0.02,-22.752 -0.831,-22.752 -2.352,-21.232 -2.426,-21.157 ; -2.426,-21.157 -2.426,-18.288 ; -2.426,-21.157 -2.426,-18.288 ; -2.426,-21.157 -2.426,-18.288 ; -2.426,-21.157 -2.426,-18.288 ; -2.426,-18.288 cw(c-1.27,-18.288) -2.285,-17.734 ; -2.426,-18.288 cw(c-1.27,-18.288) -2.285,-17.734 ; -2.426,-18.288 cw(c-1.27,-18.288) -2.285,-17.734 ; -2.426,-18.288 cw(c-1.27,-18.288) -2.285,-17.734 ; -2.426,-18.288 cw(c-1.27,-18.288) -2.285,-17.734 ; -2.426,-18.288 cw(c-1.27,-18.288) -2.285,-17.734 ; -2.426,-18.288 cw(c-1.27,-18.288) -2.285,-17.734 ; -2.426,-18.288 cw(c-1.27,-18.288) -2.285,-17.734 ; -2.285,-17.734 v1(-1.27,-15.875) ; -2.285,-17.734 v1(-1.27,-15.875) ; -2.285,-17.734 v1(-1.27,-15.875) ; -2.285,-17.734 v1(-1.27,-15.875)
Net15_2: 15.2 U8.21 | length 28.9
  Top Layer w0.254: v1(-16.605,-18.44) v1@-16.212,-18.44 ; U8.21@-14.224,-21.417 -14.372,-21.417 -16.212,-19.577 ; -16.212,-19.577 v1@-16.212,-18.44 ; -16.212,-19.577 v1@-16.212,-18.44 ; -16.212,-19.577 v1@-16.212,-18.44 ; -16.212,-19.577 v1@-16.212,-18.44
  Bottom Layer w0.254: v1(-16.605,-18.44) -16.605,-14.605 -16.154,-14.154 -16.154,-12.979 -15.292,-12.117 -15.123,-12.117 -14.791,-11.909 -14.424,-11.909 -13.812,-11.298 -13.679,-11.215 -13.537,-11.072 -13.537,-10.39 -13.712,-10.214 -13.712,-10.004 -13.081,-9.373 -5.817,-9.373 -4.889,-8.445 -4.508,-8.445 -4.318,-8.255 15.2@-4.318,-7.366
Net16_1: 16.1 U4.9 | length 60.2
  Top Layer w0.254: v1(-10.058,-12.878) -8.484,-11.303 -8.484,-6.071 16.1@-7.112,-4.699 ; v1(-6.604,-32.182) -6.472,-32.05 U4.9@-4.827,-32.05
  Bottom Layer w0.254: v1(-10.058,-12.878) -10.37,-12.878 -14.014,-16.522 -14.014,-19.094 -14.91,-19.99 -14.91,-26.543 -13.843,-27.61 -10.293,-27.61 -6.687,-24.003 -5.569,-24.291 -5.569,-29.083 -6.388,-29.902 -13.164,-29.902 -13.767,-30.505 -13.767,-31.115 -12.7,-32.182 v1(-6.604,-32.182)
Net16_2: 16.2 U8.9 | length 36.3
  Top Layer w0.254: v1(-28.448,-9.017) -28.404,-9.061 -27.667,-9.061 -26.797,-9.931 -26.797,-18.948 U8.9@-25.506,-20.239
  Bottom Layer w0.254: v1(-28.448,-9.017) -27.824,-8.393 -27.824,-8.035 -27.305,-7.516 -24.588,-7.516 -24.335,-7.769 -23.224,-7.769 -22.32,-6.864 -20.034,-6.864 -19.932,-6.966 -18.091,-6.966 -17.827,-6.702 -15.719,-6.702 -15.215,-6.198 -9.119,-6.198 -8.077,-7.239 16.2@-7.112,-7.239
Net17_1: 17.1 U5.17 | length 47.6
  Top Layer w0.254: v1(-26.435,13.614) -26.539,13.719 -26.539,14.265 -26.797,14.522 -26.797,15.104 -26.775,15.126 -26.775,15.722 U5.17@-26.368,16.129
  Bottom Layer w0.254: v1(-26.435,13.614) -28.111,13.614 -28.886,12.84 -28.886,6.306 -26.228,3.647 -26.228,3.406 -24.98,2.159 -23.788,2.159 -23.387,2.56 -23.387,2.99 -21.018,5.359 -16.049,5.359 -15.922,5.486 -10.82,5.486 -8.306,2.972 -6.121,2.972 -5.842,2.692 -4.953,2.692 -4.42,2.159 -4.42,0.889 -4.953,0.356 -7.722,0.356 17.1@-8.636,1.27
Net17_2: 17.2 U9.17 | length 26.9
  Top Layer w0.254: U9.17@-30.78,-4.7 -30.78,-1.21 -30.353,-0.783 v1(-30.353,-0.635)
  Bottom Layer w0.254: v1(-30.353,-0.635) -27.217,-0.635 -26.455,0.127 -22.372,0.127 -22.017,-0.229 -9.677,-0.229 17.2@-8.636,-1.27
Net18_1: 18.1 U5.20 | length 25.6
  Top Layer w0.254: v1(-23.114,6.985) -21.971,8.128 -21.971,8.351 -22.308,8.687 -22.308,11.584 -23.368,12.644 -23.368,13.924 U5.20@-23.068,14.224
  Bottom Layer w0.254: v1(-23.114,6.985) -21.996,5.867 -21.044,5.867 -16.684,5.867 -16.43,6.121 -9.322,6.121 -7.899,4.699 18.1@-7.112,4.699
Net18_2: 18.2 U9.20 | length 55.7
  Top Layer w0.254: U9.20@-26.97,-4.7 -26.97,-6.807 -25.756,-8.022 v1(-25.756,-10.693)
  Bottom Layer w0.254: v1(-25.756,-10.693) -24.587,-11.862 -17.812,-11.862 -16.466,-10.516 -16.466,-10.282 -14.718,-8.534 -6.477,-8.534 -5.944,-8.001 -5.944,-3.531 -6.756,-2.718 -6.756,-0.635 -6.477,-0.356 -2.413,-0.356 -1.88,0.178 -1.88,2.68 -2.413,2.68 -3.15,3.417 -3.15,8.89 -3.175,8.915 -5.436,8.915 18.2@-7.112,7.239
Net19_1: 19.1 U5.23 | length 38.5
  Top Layer w0.254: U5.23@-19.769,12.319 -19.769,12.801 -19.027,13.542 -19.027,13.993 v1(-19.011,14.009) ; v1(-15.721,13.271) -15.033,13.959 -15.033,14.392 -12.573,16.852 -12.573,18.459 -11.347,19.685 -10.973,19.685 -10.465,19.177 -10.465,17.234 -9.345,16.115 -9.271,16.04 -9.271,15.255 -9.07,15.006 -9.07,14.714 -9.196,14.588 ccw(c-9.017,14.407) -9.197,14.587 -9.271,14.513 -9.271,13.36 -10.82,11.811 -10.82,9.685 -10.458,9.322 -4.47,9.322 -3.15,8.001 -3.15,5.105 -3.429,4.826 19.1@-4.318,4.826
  Bottom Layer w0.254: v1(-19.011,14.009) -18.907,13.904 -18.907,13.573 -18.413,13.079 -18.203,13.079 v1(-15.721,13.271)
Net19_2: 19.2 U9.23 | length 33.6
  Top Layer w0.254: U9.23@-23.16,-4.7 -23.16,-3.115 -22.86,-2.815 v1(-22.86,-2.667) ; v1(-9.652,-4.191) -9.652,-4.076 -10.147,-3.582 -10.147,4.229 -8.509,5.867 -5.817,5.867 19.2@-4.318,7.366
  Bottom Layer w0.254: v1(-22.86,-2.667) -21.463,-4.064 -21.463,-4.445 -20.504,-5.404 -19.091,-5.404 -18.301,-6.194 -16.972,-6.194 -16.227,-5.449 -10.91,-5.449 v1(-9.652,-4.191)
Net20_1: 20.1 U6.19 | length 35.2
  Top Layer w0.254: v1(-6.858,28.194) -6.71,28.194 -6.456,27.94 U6.19@-4.827,27.94 ; 20.1@-0.254,11.938 3.556,15.748 3.556,18.313 4.42,19.177 6.532,19.177 6.761,18.948 v1(6.909,18.948)
  Bottom Layer w0.254: v1(-6.858,28.194) -4.191,30.861 -2.489,30.861 6.909,21.463 v1(6.909,18.948)
Net20_2: 20.2 U10.19 | length 34.3
  Top Layer w0.254: v1(-5.283,20.218) -4.877,19.812 -0.381,19.812 -0.102,19.533 -0.102,15.977 -0.254,15.824 20.2@-0.254,14.478 ; v1(-1.956,21.59) 1.575,21.59 2.261,20.904 8.219,20.904 8.496,20.628 9.638,20.628 13.14,24.13 14.696,24.13 15.463,23.363 U10.19@15.676,23.363
  Bottom Layer w0.254: v1(-5.283,20.218) -3.912,21.59 v1(-1.956,21.59)
Net21_1: 21.1 U6.22 | length 18.4
  Top Layer w0.254: U6.22@-4.827,24.13 -4.764,24.194 -3.111,24.194 v1(-3.048,24.257)
  Bottom Layer w0.254: v1(-3.048,24.257) -1.129,22.338 -1.129,21.957 0.686,20.142 1.651,20.142 2.515,19.279 2.515,12.217 21.1@3.683,11.049
Net21_2: 21.2 U10.22 | length 14.6
  Top Layer w0.254: 21.2@3.683,13.589 6.147,16.053 6.147,17.374 6.731,17.958 9.171,17.958 v1(10.077,18.164) ; v1(10.077,19.837) 10.077,19.856 11.303,21.082 12.247,21.082 12.885,20.444 U10.22@13.227,20.444
  Bottom Layer w0.254: v1(10.077,18.164) 10.059,18.971 10.059,19.079 v1(10.077,19.837)
Net22_1: 22.1 U6.3 | length 15.2
  Top Layer w0.254: U6.3@4.573,24.13 v1(6.68,24.13)
  Bottom Layer w0.254: v1(6.68,24.13) 8.496,22.314 8.496,14.279 7.452,13.236 22.1@7.452,12.192
Net22_2: 22.2 U10.3 | length 15.8
  Top Layer w0.254: 22.2@9.652,10.922 13.467,10.922 14.483,11.938 15.099,11.938 15.174,11.985 15.441,11.985 15.488,11.938 16.994,11.938 17.068,11.864 18.264,10.668 20.089,10.668 20.964,11.543 20.964,13.952 U10.3@20.428,14.402
Net22k(1)_1: 
Net22k(1)_2: 
Net22k(2)_1: 
Net22k(2)_2: 
Net23_1: 23.1 U6.4 | length 29
  Top Layer w0.254: U6.4@4.573,25.4 v1(7.899,25.4) ; v1(8.255,9.525) 8.289,9.559 9.036,9.559 9.129,9.652 9.728,9.652 10.287,9.093 23.1@10.287,7.493
  Bottom Layer w0.254: v1(7.899,25.4) 10.643,25.4 12.04,24.003 12.04,14.457 11.359,13.776 11.359,10.994 9.89,9.525 v1(8.255,9.525)
Net23_2: 23.2 U10.4 | length 15.1
  Top Layer w0.254: 23.2@12.827,7.493 13.859,7.493 16.397,10.031 20.572,10.031 21.793,11.252 21.664,11.381 21.59,11.455 21.59,13.638 21.768,13.85 21.768,14.147 21.59,14.325 21.59,15.226 U10.4@21.516,15.3 ; U10.4@21.245,15.375 21.441,15.375 U10.4@21.516,15.3
Net24_1: 24.1 U6.5 | length 43.3
  Top Layer w0.254: U6.5@4.573,26.67 6.008,26.67 6.516,27.178 v1(6.604,27.178) ; 24.1@11.811,1.651 10.643,2.819 10.643,5.512 11.455,6.325 11.455,8.28 v1(12.573,9.398)
  Bottom Layer w0.254: v1(6.604,27.178) 12.505,27.178 18.633,21.05 18.633,19.229 19.945,17.918 19.945,13.579 15.383,9.017 14.242,9.017 13.861,9.398 v1(12.573,9.398)
Net24_2: 24.2 U10.5 | length 19.9
  Top Layer w0.254: 24.2@11.811,4.191 13.799,6.179 v1(17.443,6.179) ; v1(21.666,10.008) 22.987,11.328 22.987,15.499 22.139,16.348 U10.5@22.061,16.348
  Bottom Layer w0.254: v1(17.443,6.179) 18.351,6.21 21.666,9.525 v1(21.666,10.008)
Net25_1: 25.1 U3.16 | length 35.4
  Top Layer w0.254: 25.1@11.811,-1.651 12.084,-1.378 13.785,-1.378 14.243,-1.836 14.243,-2.972 13.957,-3.258 13.957,-5.284 15.176,-6.503 15.176,-8.993 16.498,-10.315 17.046,-10.315 v1(17.15,-10.419) ; U3.16@27.468,-16.764 27.468,-16.282 27.94,-15.81 27.94,-13.48 29.54,-11.88 v1(29.54,-8.528)
  Bottom Layer w0.254: v1(17.15,-10.419) 18.134,-10.419 18.255,-10.541 18.987,-10.541 19.831,-9.696 25.613,-9.696 26.781,-8.528 v1(29.54,-8.528)
Net25_2: 25.2 U7.16 | length 26.3
  Top Layer w0.254: v1(32.05,1.194) U7.16@32.05,4.7
  Bottom Layer w0.254: 25.2@11.811,-4.191 12.884,-4.191 14.04,-3.035 18.885,-3.035 19.295,-3.445 20.304,-3.445 22.606,-1.143 29.713,-1.143 v1(32.05,1.194)
Net26_1: 26.1 U3.18 | length 26.4
  Top Layer w0.254: U3.18@25.268,-15.494 25.654,-15.108 25.654,-6.93 25.425,-6.701 v1(25.425,-6.553)
  Bottom Layer w0.254: 26.1@10.287,-7.366 11.455,-8.534 13.538,-8.534 14.834,-7.239 19.019,-7.239 19.953,-8.172 23.806,-8.172 v1(25.425,-6.553)
Net26_2: 26.2 U7.18 | length 80.1
  Top Layer w0.254: v1(29.464,6.731) 29.487,6.708 29.487,4.723 U7.18@29.51,4.7
  Bottom Layer w0.254: 26.2@12.827,-7.366 13.462,-6.731 19.527,-6.731 20.461,-7.664 22.861,-7.664 23.946,-7.036 23.946,-5.385 24.632,-4.699 34.112,-4.699 36.144,-2.667 38.659,-2.667 38.764,-2.667 38.913,-2.518 ; v1(29.464,6.731) 30.975,5.22 30.975,4.758 32.381,3.352 38.764,3.352 38.913,3.203 ; 38.913,-2.518 38.913,-2.175 ; 38.913,-2.518 38.913,-2.175 ; 38.913,-2.518 38.913,-2.175 ; 38.913,-2.518 38.913,-2.175 ; 38.913,-2.518 38.913,-2.175 ; 38.913,-2.518 38.913,-2.175 ; 38.913,-2.175 ccw(c37.973,-1.524) 38.913,-0.873 ; 38.913,-2.175 ccw(c37.973,-1.524) 38.913,-0.873 ; 38.913,-2.175 ccw(c37.973,-1.524) 38.913,-0.873 ; 38.913,-2.175 ccw(c37.973,-1.524) 38.913,-0.873 ; 38.913,-2.175 ccw(c37.973,-1.524) 38.913,-0.873 ; 38.913,-2.175 ccw(c37.973,-1.524) 38.913,-0.873 ; 38.913,-2.175 ccw(c37.973,-1.524) 38.913,-0.873 ; 38.913,-2.175 ccw(c37.973,-1.524) 38.913,-0.873 ; 38.913,-0.873 38.913,1 ; 38.913,-0.873 38.913,1 ; 38.913,-0.873 38.913,1 ; 38.913,-0.873 38.913,1 ; 38.913,1 ccw(c37.973,1.651) 38.913,2.302 ; 38.913,1 ccw(c37.973,1.651) 38.913,2.302 ; 38.913,1 ccw(c37.973,1.651) 38.913,2.302 ; 38.913,1 ccw(c37.973,1.651) 38.913,2.302 ; 38.913,1 ccw(c37.973,1.651) 38.913,2.302 ; 38.913,1 ccw(c37.973,1.651) 38.913,2.302 ; 38.913,1 ccw(c37.973,1.651) 38.913,2.302 ; 38.913,1 ccw(c37.973,1.651) 38.913,2.302 ; 38.913,2.302 38.913,3.203 ; 38.913,2.302 38.913,3.203 ; 38.913,2.302 38.913,3.203 ; 38.913,2.302 38.913,3.203 ; 38.913,2.302 38.913,3.203 ; 38.913,2.302 38.913,3.203
Net27_1: 27.1 U3.22 | length 16.9
  Top Layer w0.254: U3.22@20.868,-12.954 21.155,-12.112 21.172,-12.112 21.218,-12.065 21.218,-11.441 21.463,-11.197 v1(21.463,-11.049)
  Bottom Layer w0.254: 27.1@7.452,-12.065 10.236,-12.065 10.668,-11.633 13.792,-11.633 14.161,-12.002 14.714,-12.002 14.829,-12.117 20.395,-12.117 v1(21.463,-11.049)
Net27_2: 27.2 U7.22 | length 36.8
  Top Layer w0.254: 27.2@9.652,-10.795 9.652,-9.043 9.131,-8.522 9.131,-3.949 7.468,-2.286 7.468,-0.102 19.289,-0.102 19.812,0.421 19.812,4.75 22.574,7.512 23.941,7.512 24.43,7.023 U7.22@24.43,4.7
Net28_1: 28.1 U3.4 | length 44.6
  Top Layer w0.254: U3.4@17.268,-21.73 17.653,-21.345 17.653,-13.915 17.882,-13.686 v1(17.882,-13.538)
  Bottom Layer w0.254: 28.1@3.683,-10.922 5.715,-12.954 6.286,-12.954 6.731,-13.399 6.781,-13.449 7.326,-13.582 7.356,-13.582 7.386,-13.582 7.765,-13.316 ; v1(17.882,-13.538) 15.908,-13.538 15.06,-12.69 14.684,-12.69 14.503,-12.51 13.856,-12.51 13.837,-12.529 13.393,-12.529 13.182,-12.318 13.107,-12.244 12.972,-12.244 12.867,-12.269 12.837,-12.269 ; 7.765,-13.316 11.77,-12.504 ; 7.765,-13.316 11.77,-12.504 ; 7.765,-13.316 11.77,-12.504 ; 7.765,-13.316 11.77,-12.504 ; 11.77,-12.504 cw(c12.515,-13.388) 12.806,-12.269 ; 11.77,-12.504 cw(c12.515,-13.388) 12.806,-12.269 ; 11.77,-12.504 cw(c12.515,-13.388) 12.806,-12.269 ; 11.77,-12.504 cw(c12.515,-13.388) 12.806,-12.269 ; 11.77,-12.504 cw(c12.515,-13.388) 12.806,-12.269 ; 11.77,-12.504 cw(c12.515,-13.388) 12.806,-12.269 ; 11.77,-12.504 cw(c12.515,-13.388) 12.806,-12.269 ; 11.77,-12.504 cw(c12.515,-13.388) 12.806,-12.269 ; 12.806,-12.269 12.837,-12.269 ; 12.806,-12.269 12.837,-12.269 ; 12.806,-12.269 12.837,-12.269 ; 12.806,-12.269 12.837,-12.269
Net28_2: 28.2 U7.4 | length 37.5
  Top Layer w0.254: U7.4@25.7,-4.7 25.7,-5.772 ; v1(26.987,-9.542) 26.987,-6.978 25.781,-5.772 ; 25.7,-5.772 25.781,-5.772 ; 25.7,-5.772 25.781,-5.772 ; 25.7,-5.772 25.781,-5.772 ; 25.7,-5.772 25.781,-5.772
  Bottom Layer w0.254: 28.2@3.683,-13.462 5.521,-13.462 5.955,-13.896 7.115,-14.09 7.55,-14.09 7.975,-13.824 9.428,-13.74 10.311,-13.685 10.521,-13.515 10.813,-13.515 10.939,-13.641 11.138,-13.886 11.222,-13.97 11.463,-13.97 11.537,-14.044 13.261,-15.768 15.55,-15.768 17.009,-17.228 22.898,-17.228 23.803,-16.323 23.803,-10.893 23.895,-10.801 23.895,-10.353 24.044,-10.204 26.325,-10.204 v1(26.987,-9.542)
Net29_1: 29.1 U4.18 | length 23.9
  Top Layer w0.254: v1(2.515,-29.51) U4.18@4.573,-29.51
  Bottom Layer w0.254: 29.1@0,-11.938 -1.168,-13.106 -1.168,-14.148 -2.934,-16.821 -2.934,-17.024 -2.934,-21.368 -0.909,-23.393 0.813,-23.393 2.515,-25.095 v1(2.515,-29.51)
Net29_2: 29.2 U8.18 | length 26.1
  Top Layer w0.254: U8.18@-16.673,-24.336 -16.345,-24.663 -9.804,-24.663 -5.969,-20.828 -2.28,-20.828 -1.543,-21.565 -1.062,-21.565 -0.656,-21.971 v1(-0.508,-21.971)
  Bottom Layer w0.254: v1(-0.508,-21.971) -0.508,-21.823 -0.127,-21.442 -0.127,-21.068 0,-20.941 29.2@0,-14.478
Net30_1: 30.1 U4.22 | length 24.1
  Top Layer w0.254: U4.22@4.573,-24.43 5.888,-24.43 v1(6.604,-25.146)
  Bottom Layer w0.254: 30.1@-3.683,-11.049 -1.448,-11.049 -1.168,-10.77 1.168,-10.77 1.168,-15.1 2.934,-16.865 2.934,-21.781 4.564,-23.411 4.869,-23.411 v1(6.604,-25.146)
Net30_2: 30.2 U8.22 | length 16.7
  Top Layer w0.254: U8.22@-13.407,-20.444 -13.407,-20.366 -14.224,-19.55 -14.224,-18.11 v1(-13.233,-17.12)
  Bottom Layer w0.254: v1(-13.233,-17.12) -13.233,-17.196 -11.506,-17.399 -10.668,-16.561 -10.033,-16.561 -9.144,-15.672 -9.144,-15.098 -9.07,-15.006 -9.07,-14.714 -9.093,-14.691 -9.093,-14.608 -9.093,-14.503 -8.179,-13.589 -6.629,-13.589 -5.753,-12.713 -4.559,-12.713 30.2@-3.683,-13.589
Net31_1: 31.1 U4.4 | length 57
  Top Layer w0.254: U4.4@-4.827,-25.7 -4.804,-25.677 -2.944,-25.677 v1(-2.921,-25.654)
  Bottom Layer w0.254: 31.1@-7.452,-12.065 -4.851,-12.205 -3.137,-12.205 -2.515,-12.827 -2.515,-14.064 -3.208,-14.757 -5.512,-14.757 -6.35,-15.596 ; -6.276,-21.611 -6.35,-21.537 ; v1(-2.921,-25.654) -3.014,-25.561 -3.014,-24.873 -3.307,-24.58 -6.35,-21.537 ; -6.35,-21.537 -6.35,-17.381 ; -6.35,-21.537 -6.35,-17.381 ; -6.35,-21.537 -6.35,-17.381 ; -6.35,-21.537 -6.35,-17.381 ; -6.35,-21.537 -6.35,-17.381 ; -6.35,-21.537 -6.35,-17.381 ; -6.35,-17.381 ccw(c-7.34,-16.784) -6.35,-16.187 ; -6.35,-17.381 ccw(c-7.34,-16.784) -6.35,-16.187 ; -6.35,-17.381 ccw(c-7.34,-16.784) -6.35,-16.187 ; -6.35,-17.381 ccw(c-7.34,-16.784) -6.35,-16.187 ; -6.35,-17.381 ccw(c-7.34,-16.784) -6.35,-16.187 ; -6.35,-17.381 ccw(c-7.34,-16.784) -6.35,-16.187 ; -6.35,-17.381 ccw(c-7.34,-16.784) -6.35,-16.187 ; -6.35,-17.381 ccw(c-7.34,-16.784) -6.35,-16.187 ; -6.35,-16.187 -6.35,-15.596 ; -6.35,-16.187 -6.35,-15.596 ; -6.35,-16.187 -6.35,-15.596 ; -6.35,-16.187 -6.35,-15.596 ; -6.35,-16.187 -6.35,-15.596 ; -6.35,-16.187 -6.35,-15.596
Net31_2: 31.2 U8.4 | length 22.1
  Top Layer w0.254: U8.4@-21.425,-15.375 -21.945,-14.854 -21.945,-14.506 -21.971,-14.48 -21.971,-11.061 -21.181,-10.271 -19.276,-10.271 -15.824,-13.723 v1(-15.824,-14.935)
  Bottom Layer w0.254: v1(-15.824,-14.935) -15.197,-14.308 -15.197,-13.506 -15.189,-13.393 -14.743,-12.947 -13.469,-11.723 -13.029,-11.283 -12.74,-10.944 -12.591,-10.795 31.2@-9.652,-10.795
Net32_1: 32.1
Net32_2: 32.2
Net33_1: 33.1 U4.8 | length 49.6
  Top Layer w0.254: 33.1@-11.811,-1.651 -10.655,-2.807 -10.655,-4.686 -11.455,-5.486 -11.455,-9.093 -13.818,-11.455 -13.818,-14.293 v1(-10.363,-17.747) ; U4.8@-4.827,-30.78 -3.348,-30.78 v1(-2.794,-30.226)
  Bottom Layer w0.254: v1(-10.363,-17.747) -13.665,-21.049 -13.665,-25.959 -12.573,-27.051 -12.268,-27.051 -8.675,-23.457 -5.24,-23.457 -5.061,-23.636 -5.061,-28.518 -4.259,-29.32 -3.7,-29.32 v1(-2.794,-30.226)